# Altium PCB STM_System_Board.PCBDOC (part 8 of 16)
Units mm, origin at the board's own origin, x right, y up, seen from the top; angles counter-clockwise.
Board outline 222.53 x 100.01 mm, 6 copper layers (Top Layer, Int1 (GND), Int2 (Sign), Layer 1, Layer 2, Bottom Layer), stack 1.526 mm thick; 702 components, 774 nets, 3596 pads, 1988 vias.
Unrouted connection lines stored in the file: 1.
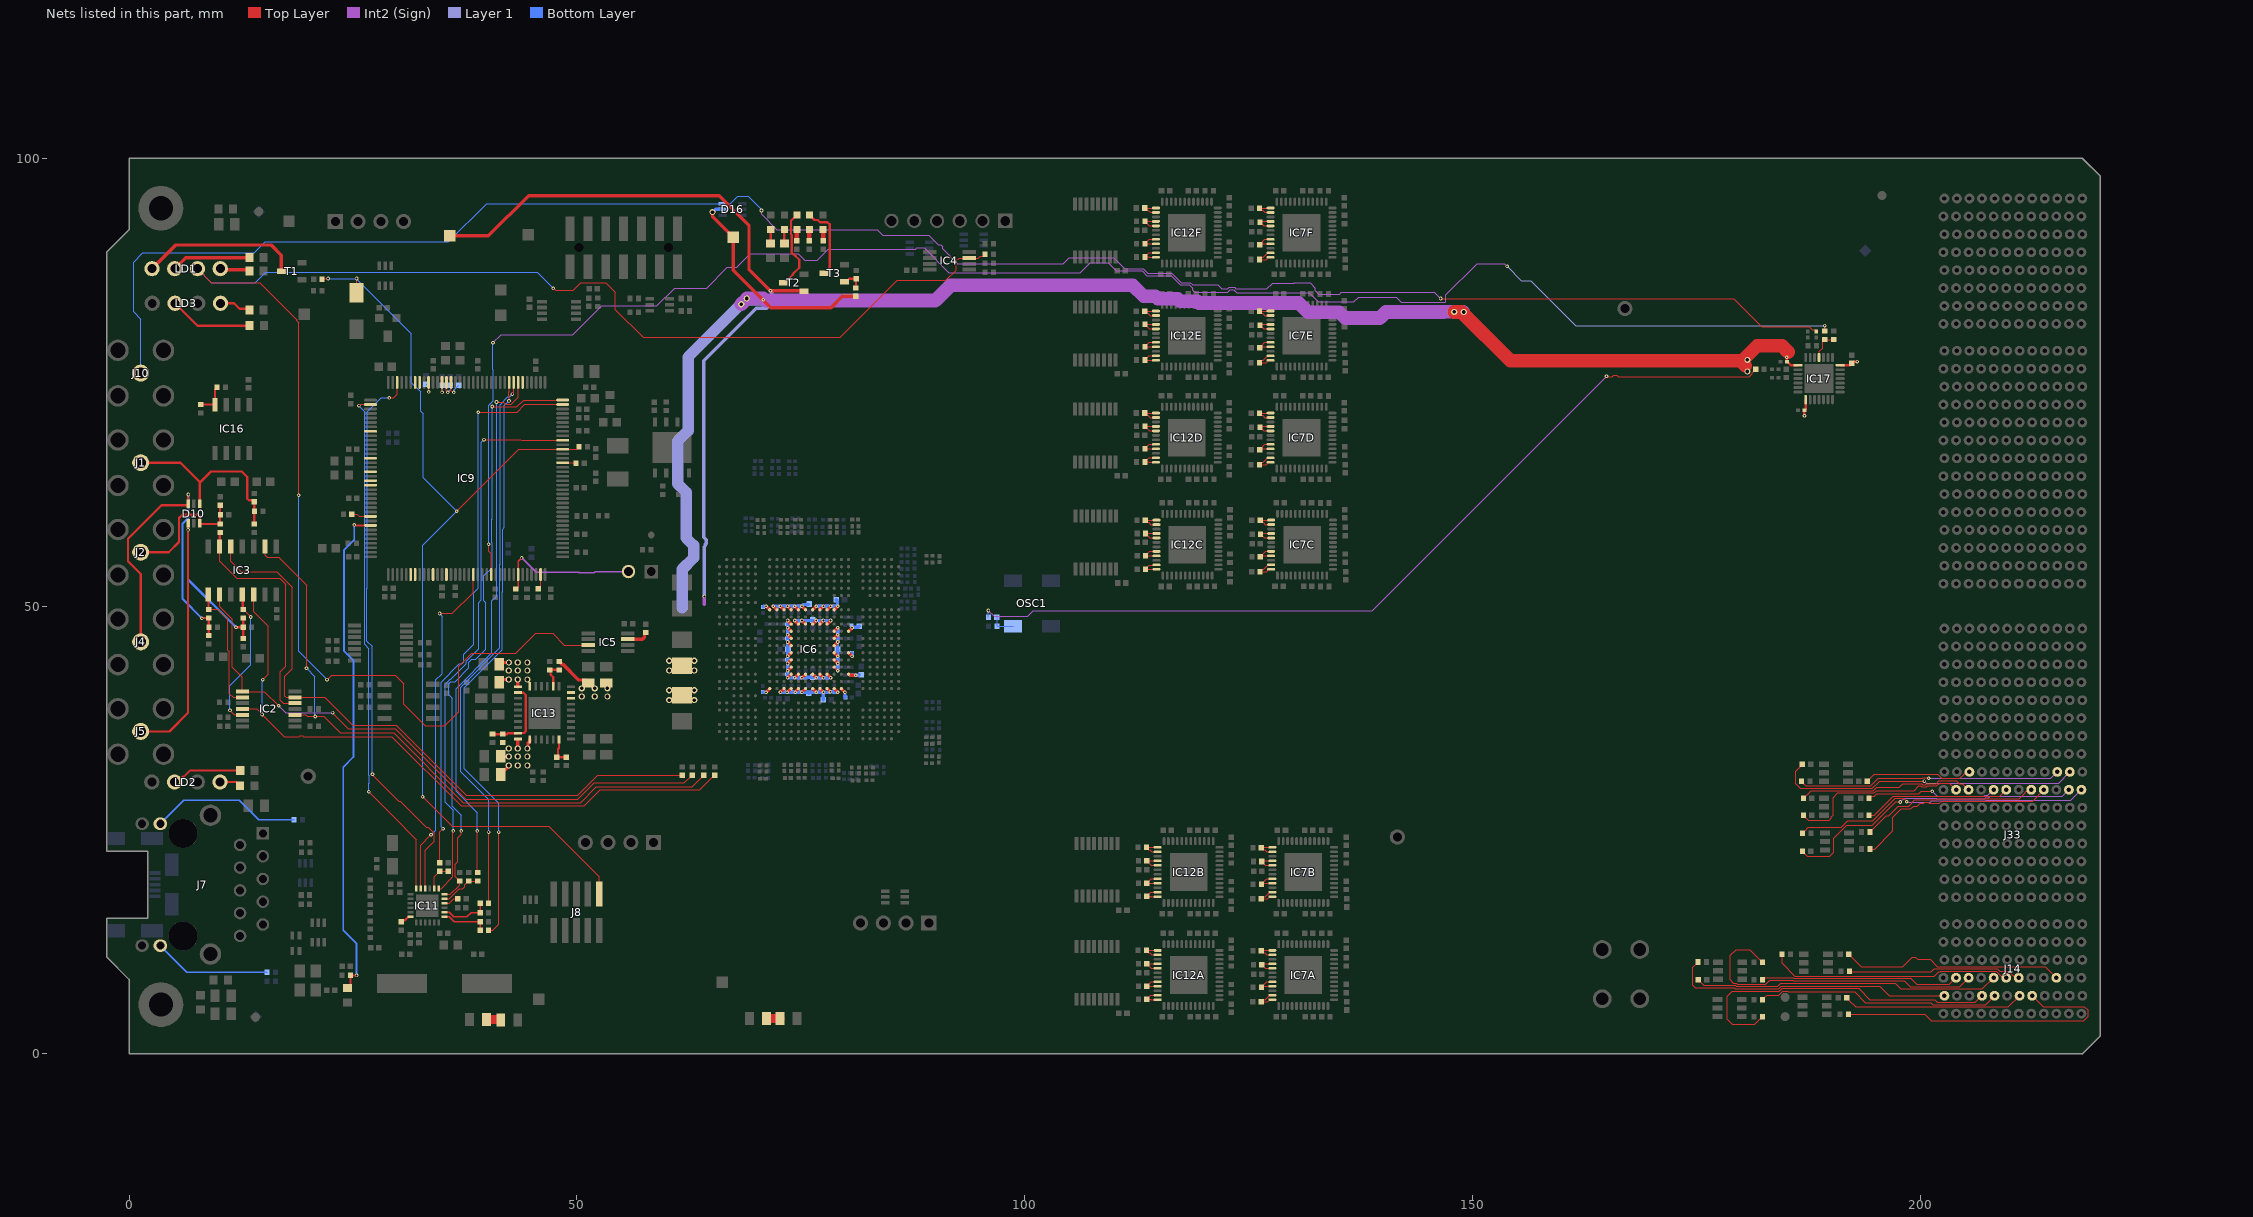
[diagram p11: the nets of this part, all layers, seen from the top]

## Via types
v1: diameter 0.4, hole 0.2, Top Layer to Bottom Layer, tented both sides, 1806 vias
v2: diameter 0.7, hole 0.4, Top Layer to Bottom Layer, tented both sides, 92 vias
v3: diameter 0.7, hole 0.4, Top Layer to Bottom Layer, 90 vias

## Nets (pads, with @x,y where several pads share a name; then routed paths per layer and width w, separated by ;. In a path a pad name is that pad's centre, name@x,y a point inside that pad or via, vN(x,y) a via of type N, cw(c..) or ccw(c..) an arc to the next point about the centre after c; other vN are vias at no path point) (continued)
NetIC2_3: IC2.3 IC3.2 R17.1 | length 73.2
  Top Layer w0.127: IC3.2@15.181,56.666 15.181,55.686 15.437,55.431 16.705,55.431 19.812,52.324 v1(19.812,43.053) ; IC2.3@18.701,37.694 IC2.3@18.539,37.856 19.73,37.856 19.916,37.669 v1(20.783,37.669) 21.756,37.669 23.575,35.85 29.525,35.85 37.308,28.067 50.399,28.067 52.177,29.845 62.879,29.845 64.138,31.104 R17.1@64.158,31.104
  Bottom Layer w0.127: v1(19.812,43.053) 20.742,42.123 20.742,37.71 v1(20.783,37.669)
NetIC2_5: IC2.5 IC3.6 R8.2 | length 26.6
  Top Layer w0.127: IC3.6@10.101,56.666 10.101,54.987 12.002,53.086 16.798,53.086 17.479,52.405 17.479,43.26 16.891,42.672 16.891,39.497 17.232,39.156 IC2.5@18.539,39.156
  Top Layer w0.254: IC3.6@10.101,56.666 10.131,56.696 10.131,58.175 R8.2@10.16,58.204
NetIC2_6: IC2.6 IC3.5 R5.1 | length 72.1
  Top Layer w0.127: IC3.5@11.371,56.666 11.371,54.996 12.519,53.848 16.485,53.848 18.23,52.102 18.23,42.995 17.399,42.164 17.399,39.933 17.526,39.806 IC2.6@18.539,39.806 21.844,39.806 24.95,36.7 29.823,36.7 37.643,28.88 50.099,28.88 52.323,31.104 R5.1@61.758,31.104
NetIC2_8: IC2.8 IC3.9 R6.1 | length 68.2
  Top Layer w0.127: IC3.9@10.101,51.266 10.101,49.945 11.525,48.521 11.525,43.151 12.639,42.037 IC2.8@12.639,40.456 15.111,40.456 v1(16.705,38.862) ; v1(22.725,38.1) 22.725,38.05 24.475,36.3 29.737,36.3 37.589,28.448 50.116,28.448 51.925,30.257 61.995,30.257 62.842,31.104 R6.1@62.862,31.104
  Int2 (Sign) w0.127: v1(16.705,38.862) 17.467,38.1 v1(22.725,38.1)
NetIC2_9: IC2.9 IC3.8 R92.2 | length 14.2
  Top Layer w0.127: R92.2@8.89,49.619 9.922,49.619 11.024,48.517 11.024,45.047 11.198,44.874 11.198,40.214 11.606,39.806 IC2.9@12.639,39.806
  Top Layer w0.254: IC3.8@8.831,51.266 8.861,51.237 8.861,49.648 R92.2@8.89,49.619
NetIC2_11: IC2.11 IC3.12 R7.1 | length 73
  Top Layer w0.127: IC2.11@12.639,38.506 14.233,38.506 v1(14.85,37.89) 17.306,35.433 18.991,35.433 19.053,35.496 19.377,35.496 19.439,35.433 29.329,35.433 37.076,27.686 50.814,27.686 52.592,29.464 63.698,29.464 65.338,31.104 R7.1@65.358,31.104 ; IC3.12@13.911,51.266 13.911,49.385 15.533,47.763 15.533,42.386 v1(14.93,41.783)
  Bottom Layer w0.127: v1(14.85,37.89) 14.89,37.93 14.89,41.743 v1(14.93,41.783)
NetIC2_12: IC2.12 IC3.11 R201.2 | length 15.9
  Top Layer w0.127: v1(11.266,38.354) 11.764,37.856 IC2.12@12.639,37.856 ; R201.2@12.698,49.675 12.718,49.675 13.589,48.804 v1(13.589,48.778)
  Top Layer w0.254: IC3.11@12.641,51.266 12.698,51.21 R201.2@12.698,49.675
  Bottom Layer w0.127: v1(11.266,38.354) 11.266,41.111 13.589,43.434 v1(13.589,48.778)
NetIC4_3: IC4.3 IC5.3 LD1.3 R218.1 | length 194.2
  Top Layer w0.127: LD1.3@7.645,87.655 9.195,86.106 14.605,86.106 18.732,81.978 18.732,81.836 18.923,81.646 v1(18.923,62.357) ; v1(22.098,41.783) 22.615,42.3 29.725,42.3 30.675,41.35 30.675,39.015 33.066,36.625 35.25,36.625 36.825,38.2 36.825,43.258 38.271,44.704 43.154,44.704 45.4,46.95 47.275,46.95 48.576,45.649 IC5.3@51.267,45.649 ; v1(47.35,85.45) 47.436,85.45 47.611,85.275 49.575,85.275 50.4,86.1 53.2,86.1 54.3,85 54.3,83.1 57.39,80.01 79.375,80.01 85.725,86.36 91.186,86.36 92.329,87.503 92.329,88.519 92.654,88.844 IC4.3@93.767,88.844 94.813,88.844 95.004,89.035 95.316,89.035 95.542,89.261 R218.1@95.542,89.281
  Bottom Layer w0.127: LD1.3@7.645,87.655 9.195,86.106 14.097,86.106 15.24,87.249 45.551,87.249 v1(47.35,85.45) ; v1(18.923,62.357) 18.923,44.958 v1(22.098,41.783)
NetIC5_7: IC5.7 R219.2 | length 2.5
  Top Layer w0.381: IC5.7@55.667,46.299 57.315,46.299 57.539,46.522 57.539,46.929 R219.2@57.638,47.028
NetIC7A_25: IC7A.25 IC7A.26 R173A.2 | length 2.7
  Top Layer w0.127: IC7A.26@127.625,11.056 126.984,11.056 126.756,11.285 126.621,11.285 126.395,11.511 R173A.2@126.395,11.531 126.42,11.556 IC7A.25@127.625,11.556
NetIC7A_28: IC7A.28 IC7A.29 R171A.2 | length 2.6
  Top Layer w0.127: IC7A.29@127.625,9.556 126.85,9.556 126.445,9.961 R171A.2@126.445,9.981 126.52,10.056 IC7A.28@127.625,10.056
NetIC7A_32: IC7A.32 IC7A.33 R169A.2 | length 2.4
  Top Layer w0.127: IC7A.33@127.625,7.556 126.511,7.556 126.511,7.576 126.991,8.056 IC7A.32@127.625,8.056
NetIC7A_35: IC7A.35 IC7A.36 R167A.2 | length 2.9
  Top Layer w0.137: IC7A.36@127.625,6.056 127.369,6.056 127.119,5.806 R167A.2@126.385,5.806 126.385,5.826 126.606,6.048 126.813,6.048 127.322,6.556 IC7A.35@127.625,6.556
NetIC7B_25: IC7B.25 IC7B.26 R173B.2 | length 2.7
  Top Layer w0.127: IC7B.26@127.625,22.556 126.984,22.556 126.756,22.785 126.621,22.785 126.395,23.011 R173B.2@126.395,23.031 126.42,23.056 IC7B.25@127.625,23.056
NetIC7B_28: IC7B.28 IC7B.29 R171B.2 | length 2.6
  Top Layer w0.127: IC7B.29@127.625,21.056 126.85,21.056 126.445,21.461 R171B.2@126.445,21.481 126.52,21.556 IC7B.28@127.625,21.556
NetIC7B_32: IC7B.32 IC7B.33 R169B.2 | length 2.4
  Top Layer w0.127: IC7B.33@127.625,19.056 126.511,19.056 126.511,19.076 126.991,19.556 IC7B.32@127.625,19.556
NetIC7B_35: IC7B.35 IC7B.36 R167B.2 | length 2.9
  Top Layer w0.137: IC7B.36@127.625,17.556 127.369,17.556 127.119,17.306 R167B.2@126.385,17.306 126.385,17.326 126.606,17.548 126.813,17.548 127.322,18.056 IC7B.35@127.625,18.056
NetIC7C_25: IC7C.25 IC7C.26 R173C.2 | length 2.7
  Top Layer w0.127: IC7C.26@127.494,59.096 126.853,59.096 126.625,59.325 126.49,59.325 126.264,59.551 R173C.2@126.264,59.571 126.289,59.596 IC7C.25@127.494,59.596
NetIC7C_28: IC7C.28 IC7C.29 R171C.2 | length 2.6
  Top Layer w0.127: IC7C.29@127.494,57.596 126.719,57.596 126.314,58.001 R171C.2@126.314,58.021 126.389,58.096 IC7C.28@127.494,58.096
NetIC7C_32: IC7C.32 IC7C.33 R169C.2 | length 2.4
  Top Layer w0.127: IC7C.33@127.494,55.596 126.38,55.596 126.38,55.616 126.86,56.096 IC7C.32@127.494,56.096
NetIC7C_35: IC7C.35 IC7C.36 R167C.2 | length 2.9
  Top Layer w0.137: IC7C.36@127.494,54.096 127.238,54.096 126.988,53.846 R167C.2@126.254,53.846 126.254,53.866 126.475,54.088 126.682,54.088 127.191,54.596 IC7C.35@127.494,54.596
NetIC7D_25: IC7D.25 IC7D.26 R173D.2 | length 2.7
  Top Layer w0.127: IC7D.26@127.429,71.044 126.788,71.044 126.56,71.273 126.425,71.273 126.199,71.499 R173D.2@126.199,71.519 126.224,71.544 IC7D.25@127.429,71.544
NetIC7D_28: IC7D.28 IC7D.29 R171D.2 | length 2.6
  Top Layer w0.127: IC7D.29@127.429,69.544 126.654,69.544 126.249,69.949 R171D.2@126.249,69.969 126.324,70.044 IC7D.28@127.429,70.044
NetIC7D_32: IC7D.32 IC7D.33 R169D.2 | length 2.4
  Top Layer w0.127: IC7D.33@127.429,67.544 126.315,67.544 126.315,67.564 126.795,68.044 IC7D.32@127.429,68.044
NetIC7D_35: IC7D.35 IC7D.36 R167D.2 | length 2.9
  Top Layer w0.137: IC7D.36@127.429,66.044 127.173,66.044 126.923,65.794 R167D.2@126.189,65.794 126.189,65.814 126.41,66.036 126.617,66.036 127.126,66.544 IC7D.35@127.429,66.544
NetIC7E_25: IC7E.25 IC7E.26 R173E.2 | length 2.7
  Top Layer w0.127: IC7E.26@127.429,82.429 126.788,82.429 126.56,82.658 126.425,82.658 126.199,82.884 R173E.2@126.199,82.904 126.224,82.929 IC7E.25@127.429,82.929
NetIC7E_28: IC7E.28 IC7E.29 R171E.2 | length 2.6
  Top Layer w0.127: IC7E.29@127.429,80.929 126.654,80.929 126.249,81.334 R171E.2@126.249,81.354 126.324,81.429 IC7E.28@127.429,81.429
NetIC7E_32: IC7E.32 IC7E.33 R169E.2 | length 2.4
  Top Layer w0.127: IC7E.33@127.429,78.929 126.315,78.929 126.315,78.949 126.795,79.429 IC7E.32@127.429,79.429
NetIC7E_35: IC7E.35 IC7E.36 R167E.2 | length 2.9
  Top Layer w0.137: IC7E.36@127.429,77.429 127.173,77.429 126.923,77.179 R167E.2@126.189,77.179 126.189,77.199 126.41,77.421 126.617,77.421 127.126,77.929 IC7E.35@127.429,77.929
NetIC7F_25: IC7F.25 IC7F.26 R173F.2 | length 2.7
  Top Layer w0.127: IC7F.26@127.429,93.929 126.788,93.929 126.56,94.158 126.425,94.158 126.199,94.384 R173F.2@126.199,94.404 126.224,94.429 IC7F.25@127.429,94.429
NetIC7F_28: IC7F.28 IC7F.29 R171F.2 | length 2.6
  Top Layer w0.127: IC7F.29@127.429,92.429 126.654,92.429 126.249,92.834 R171F.2@126.249,92.854 126.324,92.929 IC7F.28@127.429,92.929
NetIC7F_32: IC7F.32 IC7F.33 R169F.2 | length 2.4
  Top Layer w0.127: IC7F.33@127.429,90.429 126.315,90.429 126.315,90.449 126.795,90.929 IC7F.32@127.429,90.929
NetIC7F_35: IC7F.35 IC7F.36 R167F.2 | length 2.9
  Top Layer w0.137: IC7F.36@127.429,88.929 127.173,88.929 126.923,88.679 R167F.2@126.189,88.679 126.189,88.699 126.41,88.921 126.617,88.921 127.126,89.429 IC7F.35@127.429,89.429
NetIC9_22: IC9.22 R128.2 | length 1.5
  Top Layer w0.127: IC9.22@48.41,65.996 49.809,65.996 R128.2@49.88,65.925
NetIC9_27: IC9.27 IC11.13 | length 62
  Top Layer w0.127: IC11.13@34.553,18.461 34.844,18.461 36.154,19.771 36.154,24.851 v1(36.195,24.892) ; v1(39.624,68.58) 43.727,68.58 43.811,68.496 IC9.27@48.41,68.496
  Bottom Layer w0.127: v1(36.195,24.892) 36.195,27.2 35.275,28.12 35.275,41.261 35.833,41.819 35.915,41.819 37.661,43.566 37.661,43.839 39.045,45.223 39.045,50.388 39.335,50.678 39.335,68.291 v1(39.624,68.58)
NetIC9_35: IC9.35 R60.1 | length 62.2
  Top Layer w0.127: R60.1@34.695,21.335 34.695,24.789 v1(35.052,25.146) ; v1(38.989,71.628) 43.307,71.628 44.175,72.496 46.417,72.496 46.447,72.526 47.279,72.526 47.309,72.496 IC9.35@48.41,72.496
  Bottom Layer w0.127: v1(35.052,25.146) 34.825,25.373 34.825,41.5 36.876,43.552 37.119,43.552 37.347,43.78 37.347,44.597 38.472,45.721 38.472,51.47 38.989,51.987 v1(38.989,71.628)
NetIC9_36: IC9.36 IC11.12 R98.2 | length 67.5
  Top Layer w0.127: IC11.12@35.203,17.811 35.873,17.811 36.909,18.847 R98.2@36.909,19.304 36.889,19.304 36.408,19.784 36.408,21.175 36.703,21.469 36.703,24.13 37.084,24.511 v1(37.084,24.892) ; v1(40.538,72.272) 40.557,72.254 43.298,72.254 44.04,72.996 IC9.36@48.41,72.996
  Bottom Layer w0.127: v1(37.084,24.892) 37.084,26.67 36.1,27.654 36.1,39.723 35.709,40.113 35.709,40.437 35.709,41.337 35.938,41.565 36.391,41.565 37.915,43.09 37.915,43.734 38.232,44.051 38.676,44.051 39.826,45.201 39.826,50.388 39.615,50.6 39.615,53.375 40.522,54.283 40.522,57.058 40.504,57.077 40.504,59.672 40.538,59.707 v1(40.538,72.272)
NetIC9_42: IC9.42 | length 0
  Top Layer w0.127: IC9.42@43.935,74.971 IC9.42@43.939,74.975
NetIC9_43: IC9.43 R50.1 | length 59.9
  Top Layer w0.127: v1(38.862,24.892) 38.862,20.29 R50.1@38.909,20.244 ; v1(41.021,72.771) 41.783,72.771 42.046,72.508 42.663,72.508 43.435,73.28 IC9.43@43.435,74.971
  Bottom Layer w0.127: v1(38.862,24.892) 38.862,26.938 36.5,29.3 36.5,40.79 40.504,44.794 40.504,50.581 41.021,51.098 v1(41.021,72.771)
NetIC9_44: IC9.44 R45.1 | length 62
  Top Layer w0.127: v1(40.132,24.765) 40.139,24.758 R45.1@40.139,16.811 ; v1(42.799,73.66) 42.799,73.734 42.935,73.87 IC9.44@42.935,74.971
  Bottom Layer w0.127: v1(40.132,24.765) 40.132,28.368 37,31.5 37,40.931 41.406,45.337 41.406,54.654 41.439,54.687 41.439,72.471 42.302,73.334 42.473,73.334 v1(42.799,73.66)
NetIC9_45: IC9.45 R46.1 | length 65.6
  Top Layer w0.127: R46.1@40.139,13.814 40.611,13.814 41.275,14.478 v1(41.275,24.765) ; v1(42.418,72.898) 42.418,73.463 42.409,73.472 42.409,73.911 42.435,73.938 IC9.45@42.435,74.971
  Bottom Layer w0.127: v1(41.275,24.765) 41.275,27.988 37.4,31.863 37.4,40.86 41.66,45.12 41.66,51.587 41.693,51.62 41.693,58.572 41.91,58.79 41.91,72.39 v1(42.418,72.898)
NetIC9_58: IC9.58 R186.1 | length 2.4
  Top Layer w0.127: IC9.58@35.935,74.971 35.935,74.056 36.089,73.902 36.198,73.902 v1(36.25,73.85)
  Bottom Layer w0.127: v1(36.25,73.85) 36.302,73.902 36.302,74.152 36.805,74.655 R186.1@36.825,74.655
NetIC9_59: IC9.59 R187.1 | length 2.2
  Top Layer w0.127: IC9.59@35.435,74.971 35.435,74.056 35.575,73.916 v1(35.575,73.85)
  Bottom Layer w0.127: v1(35.575,73.85) 36.029,74.303 36.029,74.502 R187.1@35.875,74.655
NetIC9_60: IC9.60 R188.1 | length 1.9
  Top Layer w0.127: IC9.60@34.935,74.971 34.935,73.865 v1(34.95,73.85)
  Bottom Layer w0.127: v1(34.95,73.85) R188.1@34.95,74.655
NetIC9_63: IC9.63 R189.1 | length 2.1
  Top Layer w0.127: IC9.63@33.435,74.971 33.435,73.915 v1(33.45,73.9)
  Bottom Layer w0.127: R189.1@33.15,74.755 33.17,74.755 33.396,74.529 33.396,74.344 33.45,74.29 v1(33.45,73.9)
NetIC9_65: IC9.65
NetIC9_66: IC9.66
NetIC9_70: IC9.70 IC11.16 | length 62.5
  Top Layer w0.127: v1(27.172,31.216) 27.172,31.172 30.127,28.217 30.247,28.217 33.173,25.292 33.427,25.292 34.096,24.622 34.096,23.758 33.053,22.715 IC11.16@33.053,18.461 ; v1(29.042,73.238) 29.55,73.238 29.935,73.623 IC9.70@29.935,74.971
  Bottom Layer w0.127: v1(27.172,31.216) 27.149,31.239 27.149,45.484 26.543,46.091 26.543,51.971 26.578,52.006 26.578,71.663 28.153,73.238 v1(29.042,73.238)
NetIC9_74: IC9.74 IC11.18 | length 58
  Top Layer w0.127: v1(25.654,72.372) 25.728,72.372 25.853,72.496 IC9.74@26.96,72.496 ; v1@26.759,29.248 27.651,28.356 27.67,28.356 30.845,25.181 30.845,25.118 32.053,23.91 IC11.18@32.053,18.461
  Bottom Layer w0.127: v1(25.654,72.372) 26.324,71.702 26.324,52.111 26.289,52.077 26.289,45.72 26.772,45.237 26.772,31.083 26.806,31.048 26.806,30.235 26.772,30.2 v1(26.772,29.261)
NetIC9_80: IC9.80
NetIC9_86: IC9.86
NetIC9_89: IC9.89
NetIC9_91: IC9.91
NetIC9_92: IC9.92
NetIC9_99: IC9.99 R176.2 | length 2.2
  Top Layer w0.127: R176.2@24.87,60.25 25.425,60.25 25.679,59.996 IC9.99@26.96,59.996
NetIC9_101: IC9.101 R73.1 R75.2 | length 56.4
  Top Layer w0.203: R73.1@24.384,7.35 24.727,7.693 R75.2@24.727,8.763 v1(25.4,8.763) ; v1(25.146,59.055) 25.199,59.055 25.258,58.996 IC9.101@26.96,58.996
  Bottom Layer w0.203: v1(25.146,59.055) 25.146,57.404 23.978,56.236 23.978,45.012 25.048,43.942 25.048,33.15 23.908,32.011 23.908,13.811 25.4,12.319 v1(25.4,8.763)
NetIC9_114: IC9.114
NetIC9_115: IC9.115
NetIC9_119: IC9.119
NetIC9_122: IC9.122
NetIC9_128: IC9.128 IC11.17 | length 38.6
  Top Layer w0.127: IC11.17@32.553,18.461 32.551,18.463 32.551,23.305 v1(33.706,24.46) ; v1(34.671,49.169) 36.087,49.169 38.415,51.497 38.415,53.501 IC9.128@38.435,53.521
  Bottom Layer w0.127: v1(33.706,24.46) 33.753,24.46 34.25,24.958 34.25,41.75 34.966,42.466 34.966,48.874 v1(34.671,49.169)
NetIC9_132: IC9.132 R243.1 | length 189.8
  Top Layer w0.127: v1(40.132,56.896) 40.132,56.134 40.435,55.831 IC9.132@40.435,53.521
  Top Layer w0.137: v1(189.278,81.307) 189.278,80.706 R243.1@189.3,80.684
  Int2 (Sign) w0.127: v1(40.625,79.4) 41.525,80.3 49.525,80.3 52.75,83.525 58.925,83.525 60.9,85.5 64.5,85.5 66.8,87.8 67.825,87.8 69.366,89.34 70.159,89.34 70.2,89.3 74.725,89.3 75.4,88.625 76.825,88.625 78.025,89.825 87.805,89.825 87.956,89.975 88.763,89.975 91.513,87.225 106.2,87.225 107.275,88.3 109.3,88.3 110.2,87.4 113.1,87.4 113.611,86.889 116.118,86.889 116.13,86.876 116.316,86.876 117.339,85.854 118.371,85.854 118.74,85.485 118.74,85.243 118.969,85.014 119.989,85.014 120.002,85.026 122.65,85.026 122.927,85.303 123.297,85.303 123.625,84.975 131.75,84.975 132.765,83.96 136.735,83.96 137.25,84.475 141.45,84.475 142.025,83.9 146.901,83.9 146.975,83.974 146.975,84.725 150.475,88.225 153.525,88.225 v1(153.825,87.925)
  Layer 1 w0.127: v1(153.825,87.925) 155.425,86.325 156.475,86.325 161.493,81.307 164.425,81.307
  Layer 1 w0.137: 164.425,81.307 v1(189.278,81.307)
  Bottom Layer w0.127: v1(40.132,56.896) 40.132,72.419 40.64,72.927 40.64,76.414 40.627,76.427 40.627,79.398 v1(40.625,79.4)
NetIC9_138: IC9.138 JP2.2 R96.1 | length 16.5
  Top Layer w0.152: R96.1@43.174,51.889 43.194,51.889 43.435,52.131 IC9.138@43.435,53.521 43.435,54.992 v1(43.815,55.372)
  Int2 (Sign) w0.152: v1(43.815,55.372) 45.444,53.743 50.205,53.743 50.249,53.699 51.876,53.699 52.025,53.848 JP2.2@55.753,53.848
NetIC9_143: IC9.143 R97.1 | length 1.7
  Top Layer w0.127: R97.1@45.681,51.919 45.701,51.919 45.935,52.153 IC9.143@45.935,53.521
NetIC11_7: IC11.7 R43.2 R46.2 | length 5.2
  Top Layer w0.152: IC11.7@35.203,15.311 35.738,15.311 36.295,14.754 R43.2@39.199,14.754 R46.2@39.199,13.814
NetIC11_8: IC11.8 R42.2 R45.2 | length 5.4
  Top Layer w0.152: IC11.8@35.203,15.811 35.738,15.811 36.238,15.311 37.723,15.311 38.193,15.781 R42.2@39.199,15.781 R45.2@39.199,16.811
NetIC11_10: IC11.10 R47.1 | length 1.7
  Top Layer w0.127: IC11.10@35.203,16.811 35.734,16.811 36.238,17.314 R47.1@36.692,17.314
NetIC11_11: IC11.11 R44.2 R50.2 | length 4.6
  Top Layer w0.127: IC11.11@35.203,17.311 35.738,17.311 36.876,18.449 37.234,18.449 37.448,18.663 37.448,18.863 37.889,19.304 R44.2@37.909,19.304 R50.2@38.909,19.304
NetIC11_14: IC11.14 R60.2 R99.2 | length 3.2
  Top Layer w0.127: IC11.14@34.053,18.461 34.053,19.774 34.675,20.395 R60.2@34.695,20.395 R99.2@35.647,20.395
NetIC11_24: IC11.24 R49.1 | length 1.2
  Top Layer w0.254: R49.1@30.384,14.754 30.547,14.917 30.804,14.917 31.198,15.311 IC11.24@31.403,15.311
NetIC12A_25: IC12A.25 IC12A.26 R193A.2 | length 2.7
  Top Layer w0.127: IC12A.26@114.825,11.056 114.184,11.056 113.931,11.31 113.796,11.31 113.57,11.536 R193A.2@113.57,11.556 IC12A.25@114.825,11.556
NetIC12A_28: IC12A.28 IC12A.29 R191A.2 | length 2.6
  Top Layer w0.127: IC12A.29@114.825,9.556 114.09,9.556 113.61,10.036 R191A.2@113.61,10.056 IC12A.28@114.825,10.056
NetIC12A_32: IC12A.32 IC12A.33 R184A.2 | length 2.6
  Top Layer w0.127: IC12A.33@114.825,7.556 R184A.2@113.61,7.556 113.61,7.576 114.09,8.056 IC12A.32@114.825,8.056
NetIC12A_35: IC12A.35 IC12A.36 R175A.2 | length 2.3
  Top Layer w0.127: R175A.2@113.61,6.09 114.037,6.09 114.07,6.056 IC12A.36@114.825,6.056 ; R175A.2@113.823,6.323 113.836,6.336 114.038,6.538 114.806,6.538 IC12A.35@114.825,6.556
NetIC12B_25: IC12B.25 IC12B.26 R193B.2 | length 2.7
  Top Layer w0.127: IC12B.26@114.825,22.556 114.184,22.556 113.931,22.81 113.797,22.81 113.57,23.036 R193B.2@113.57,23.056 IC12B.25@114.825,23.056
NetIC12B_28: IC12B.28 IC12B.29 R191B.2 | length 2.6
  Top Layer w0.127: IC12B.29@114.825,21.056 114.09,21.056 113.61,21.536 R191B.2@113.61,21.556 IC12B.28@114.825,21.556
NetIC12B_32: IC12B.32 IC12B.33 R184B.2 | length 2.6
  Top Layer w0.127: IC12B.33@114.825,19.056 R184B.2@113.61,19.056 113.61,19.076 114.09,19.556 IC12B.32@114.825,19.556
NetIC12B_35: IC12B.35 IC12B.36 R175B.2 | length 2.3
  Top Layer w0.127: R175B.2@113.61,17.59 114.037,17.59 114.07,17.556 IC12B.36@114.825,17.556 ; R175B.2@113.823,17.823 113.836,17.836 114.038,18.038 114.806,18.038 IC12B.35@114.825,18.056
NetIC12C_25: IC12C.25 IC12C.26 R193C.2 | length 2.7
  Top Layer w0.127: IC12C.26@114.694,59.096 114.053,59.096 113.8,59.35 113.665,59.35 113.439,59.576 R193C.2@113.439,59.596 IC12C.25@114.694,59.596
NetIC12C_28: IC12C.28 IC12C.29 R191C.2 | length 2.6
  Top Layer w0.127: IC12C.29@114.694,57.596 113.959,57.596 113.479,58.076 R191C.2@113.479,58.096 IC12C.28@114.694,58.096
NetIC12C_32: IC12C.32 IC12C.33 R184C.2 | length 2.6
  Top Layer w0.127: IC12C.33@114.694,55.596 R184C.2@113.479,55.596 113.479,55.616 113.959,56.096 IC12C.32@114.694,56.096
NetIC12C_35: IC12C.35 IC12C.36 R175C.2 | length 2.3
  Top Layer w0.127: R175C.2@113.479,54.129 113.906,54.129 113.939,54.096 IC12C.36@114.694,54.096 ; R175C.2@113.692,54.363 113.705,54.376 113.907,54.578 114.675,54.578 IC12C.35@114.694,54.596
NetIC12D_25: IC12D.25 IC12D.26 R193D.2 | length 2.7
  Top Layer w0.127: IC12D.26@114.629,71.044 113.988,71.044 113.735,71.298 113.6,71.298 113.374,71.524 R193D.2@113.374,71.544 IC12D.25@114.629,71.544
NetIC12D_28: IC12D.28 IC12D.29 R191D.2 | length 2.6
  Top Layer w0.127: IC12D.29@114.629,69.544 113.894,69.544 113.414,70.024 R191D.2@113.414,70.044 IC12D.28@114.629,70.044
NetIC12D_32: IC12D.32 IC12D.33 R184D.2 | length 2.6
  Top Layer w0.127: IC12D.33@114.629,67.544 R184D.2@113.414,67.544 113.414,67.564 113.884,68.034 114.619,68.034 IC12D.32@114.629,68.044
NetIC12D_35: IC12D.35 IC12D.36 R175D.2 | length 2.3
  Top Layer w0.127: R175D.2@113.414,66.078 113.841,66.078 113.874,66.044 IC12D.36@114.629,66.044 ; R175D.2@113.627,66.311 113.64,66.324 113.842,66.526 114.61,66.526 IC12D.35@114.629,66.544
NetIC12E_25: IC12E.25 IC12E.26 R193E.2 | length 2.7
  Top Layer w0.127: IC12E.26@114.629,82.429 113.988,82.429 113.735,82.683 113.6,82.683 113.374,82.909 R193E.2@113.374,82.929 IC12E.25@114.629,82.929
NetIC12E_28: IC12E.28 IC12E.29 R191E.2 | length 2.6
  Top Layer w0.127: IC12E.29@114.629,80.929 113.894,80.929 113.414,81.409 R191E.2@113.414,81.429 IC12E.28@114.629,81.429
NetIC12E_32: IC12E.32 IC12E.33 R184E.2 | length 2.6
  Top Layer w0.127: IC12E.33@114.629,78.929 R184E.2@113.414,78.929 113.414,78.949 113.894,79.429 IC12E.32@114.629,79.429
NetIC12E_35: IC12E.35 IC12E.36 R175E.2 | length 2.3
  Top Layer w0.127: R175E.2@113.414,77.463 113.841,77.463 113.874,77.429 IC12E.36@114.629,77.429 ; R175E.2@113.627,77.696 113.64,77.709 113.842,77.911 114.61,77.911 IC12E.35@114.629,77.929
NetIC12F_25: IC12F.25 IC12F.26 R193F.2 | length 2.7
  Top Layer w0.127: IC12F.26@114.629,93.929 113.988,93.929 113.735,94.183 113.6,94.183 113.374,94.409 R193F.2@113.374,94.429 IC12F.25@114.629,94.429
NetIC12F_28: IC12F.28 IC12F.29 R191F.2 | length 2.6
  Top Layer w0.127: IC12F.29@114.629,92.429 113.894,92.429 113.414,92.909 R191F.2@113.414,92.929 IC12F.28@114.629,92.929
NetIC12F_32: IC12F.32 IC12F.33 R184F.2 | length 2.6
  Top Layer w0.127: IC12F.33@114.629,90.429 R184F.2@113.414,90.429 113.414,90.449 113.894,90.929 IC12F.32@114.629,90.929
NetIC12F_35: IC12F.35 IC12F.36 R175F.2 | length 2.3
  Top Layer w0.127: R175F.2@113.414,88.963 113.841,88.963 113.874,88.929 IC12F.36@114.629,88.929 ; R175F.2@113.627,89.196 113.64,89.209 113.842,89.411 114.61,89.411 IC12F.35@114.629,89.429
NetIC13_6: IC13.6 R234.1 R235.1 | length 3.2
  Top Layer w0.254: IC13.6@48.005,35.112 48.005,34.162 47.879,34.036 47.879,33.273 R235.1@47.732,33.127 R234.1@48.808,33.127
NetIC13_18: IC13.18 R232.1 R233.1 | length 3
  Top Layer w0.254: IC13.18@47.347,41.037 47.347,42.061 47.057,42.351 47.057,42.725 46.894,42.888 R232.1@47.881,42.888 ; R232.1@48.012,42.864 R232.1@48.032,42.864
NetIC13_24: IC13.24 IC13.31 R230.1 R231.1 | length 8.9
  Top Layer w0.254: R231.1@40.573,35.7 40.586,35.687 42.164,35.687 42.277,35.8 IC13.31@43.409,35.8 43.432,35.823 44.078,35.823 44.272,36.017 44.272,40.056 44.001,40.327 43.432,40.327 IC13.24@43.409,40.35
NetIC16_4: IC16.4 R237.1 R238.2 | length 3.5
  Top Layer w0.254: R238.2@7.994,72.485 9.416,72.485 9.589,72.658 9.589,74.174 9.817,74.402 R237.1@9.817,74.422
NetIC17_4: IC17.4 R243.2 R244.2 | length 3.3
  Top Layer w0.137: IC17.4@188.65,77.739 188.681,77.77 188.681,78.42 189.059,78.797 189.059,79.523 189.28,79.744 R243.2@189.3,79.744 R244.2@190.275,79.744
NetJ1_1: D10.1 J1.1 R15.1 R19.2 R20.1 | length 21.8
  Top Layer w0.254: J1.1@1.3,66 5.735,66 7.889,63.846 ; D10.1@7.889,61.425 7.889,63.846 ; R15.1@13.97,59.144 R19.2@13.97,61.633 13.807,61.796 13.388,61.796 13.208,61.976 13.208,64.389 12.573,65.024 9.144,65.024 7.966,63.846 7.889,63.846
NetJ2_1: D10.6 J2.1 R8.1 R9.2 R10.1 | length 15.2
  Top Layer w0.254: J2.1@1.3,56 4.438,56 5.588,57.15 5.588,59.817 5.969,60.198 7.74,60.198 7.889,60.049 D10.6@7.889,59.225 7.889,59.217 7.962,59.144 R8.1@10.16,59.144 R9.2@10.16,61.252
NetJ4_1: D10.3 J4.1 R92.1 R93.2 R200.1 | length 39.3
  Top Layer w0.254: J4.1@1.3,46 1.3,53.564 -0.127,54.991 -0.127,57.501 3.624,61.252 6.516,61.252 6.589,61.325 D10.3@6.589,61.425 6.589,62.413 v1(6.628,62.452) ; v1(8.128,48.641) 8.147,48.66 8.871,48.66 R92.1@8.89,48.679 R93.2@8.89,46.698
  Bottom Layer w0.254: v1(6.628,62.452) 6.628,59.841 5.969,59.182 5.969,50.8 v1(8.128,48.641)
NetJ5_1: D10.4 J5.1 R201.1 R202.2 R203.1 | length 43.5
  Top Layer w0.254: J5.1@1.3,36 4.504,36 6.589,38.085 v1(6.589,58.496) D10.4@6.589,59.225 ; v1(11.938,47.625) R203.1@12.738,47.625 R203.1@12.754,47.625 ; R202.2@12.754,46.384 R203.1@12.754,47.625 ; R201.1@12.754,48.679 R203.1@12.754,47.625
  Bottom Layer w0.254: v1(6.589,58.496) 6.589,52.974 v1(11.938,47.625)
NetJ7_L1: J7.L1 R212.2 | length 16.9
  Bottom Layer w0.152: J7.L1@3.49,25.695 6.116,28.321 12.319,28.321 14.478,26.162 R212.2@18.424,26.162
NetJ7_L3: J7.L3 R39.2 | length 13.1
  Bottom Layer w0.152: J7.L3@3.49,12.095 6.441,9.144 R39.2@15.405,9.144
NetJ10_1: C129.1 D16.6 J10.1 | length 211.9
  Top Layer w0.127: v1(146.4,84.325) 179.125,84.325 182.25,81.2 187.534,81.2 187.908,80.826 188.214,80.826 188.35,80.689 C129.1@188.35,80.664
  Int2 (Sign) w0.127: v1(70.6,94.15) 70.6,93.725 72.301,92.024 83.515,92.024 84.125,91.415 89.26,91.415 90.335,90.341 90.587,90.341 90.816,90.112 90.816,89.86 92.47,88.206 104.306,88.206 104.95,88.85 109.925,88.85 111.121,87.654 113.205,87.654 113.716,87.143 116.223,87.143 116.235,87.13 116.421,87.13 117.444,86.108 118.476,86.108 118.734,85.85 118.862,85.85 118.871,85.841 121.534,85.841 121.975,85.4 122.665,85.4 122.821,85.557 123.403,85.557 123.559,85.4 127.025,85.4 127.675,86.05 130.049,86.05 130.064,86.065 131.844,86.065 132.408,85.5 132.408,85.217 132.8,84.825 135.127,84.825 135.329,85.026 145.699,85.026 v1(146.4,84.325)
  Bottom Layer w0.127: J10.1@1.3,76 1.3,82.025 0.5,82.825 0.5,88.4 1.525,89.425 13.975,89.425 15.2,90.65 35.65,90.65 39.925,94.925 D16.6@66.275,94.925 67.125,94.925 67.925,95.725 69.125,95.725 70.501,94.349 70.501,94.323 70.6,94.224 v1(70.6,94.15)
NetJ14_C3: J14.C3 R125.2 | length 25.2
  Top Layer w0.127: R125.2@191.96,11.141 191.96,11.121 192.186,10.895 192.206,10.895 193.342,9.759 198.009,9.759 199.065,10.816 199.412,10.816 199.643,10.585 201.04,10.585 201.866,9.759 213.879,9.759 J14.C3@215.139,8.5
NetJ14_E2: J14.E2 R126.2 | length 34.9
  Top Layer w0.127: R126.2@191.967,4.371 R126.2@191.92,4.418 200.455,4.418 201.165,3.708 218.194,3.708 218.679,4.193 218.679,4.866 218.262,5.283 213.656,5.283 J14.E2@212.439,6.5
NetJ14_F2: J14.F2 R127.2 | length 20.3
  Top Layer w0.127: R127.2@191.731,6.268 191.731,6.248 191.957,6.022 191.977,6.022 192.748,5.251 209.79,5.251 J14.F2@211.039,6.5
NetJ14_F3: J14.F3 R137.2 | length 19.5
  Top Layer w0.127: R137.2@192.047,9.241 192.113,9.175 201.175,9.175 201.494,9.494 208.551,9.494 208.805,9.24 209.845,9.24 210.279,8.807 210.279,8.782 210.376,8.686 210.753,8.686 J14.F3@210.939,8.5
NetJ14_G3: J14.G3 R138.2 | length 27.2
  Top Layer w0.127: R138.2@184.518,11.141 184.518,10.122 185.953,8.687 201.529,8.687 202.037,9.195 202.207,9.195 202.253,9.24 208.445,9.24 208.879,8.807 208.879,8.782 208.976,8.686 209.353,8.686 J14.G3@209.539,8.5
NetJ14_H2: J14.H2 R139.2 | length 27.3
  Top Layer w0.127: R139.2@182.343,6.075 182.343,6.095 182.57,6.322 182.59,6.322 182.847,6.579 184.145,6.579 184.575,7.009 185.147,7.009 185.231,6.925 192.617,6.925 193.827,5.715 201.117,5.715 201.327,5.505 207.244,5.505 J14.H2@208.239,6.5
NetJ14_H3: J14.H3 R140.2 | length 34.2
  Top Layer w0.127: R140.2@175.164,8.284 175.164,8.264 175.391,8.038 175.407,8.038 175.788,7.657 179.283,7.657 179.41,7.53 182.817,7.53 182.856,7.569 184.058,7.569 184.363,7.874 197.129,7.874 197.752,7.251 206.89,7.251 J14.H3@208.139,8.5
NetJ14_I2: J14.I2 R141.2 | length 36.8
  Top Layer w0.127: R141.2@182.343,4.168 182.343,4.148 182.117,3.922 182.097,3.922 181.485,3.31 178.963,3.31 178.41,3.863 178.41,6.437 178.963,6.99 184.198,6.99 184.522,7.315 193.065,7.315 194.31,6.071 201.549,6.071 201.86,5.759 206.098,5.759 J14.I2@206.839,6.5
NetJ14_J3: J14.J3 R142.2 | length 34.9
  Top Layer w0.127: R142.2@182.343,10.234 182.343,10.254 182.117,10.481 182.097,10.481 180.919,11.659 179.4,11.659 178.74,10.998 178.74,8.268 179.096,7.911 179.388,7.911 179.515,7.784 182.712,7.784 183.158,8.23 185.692,8.23 185.743,8.179 198.145,8.179 198.806,7.518 202.114,7.518 202.127,7.505 202.951,7.505 202.964,7.518 204.357,7.518 J14.J3@205.339,8.5
NetJ14_K3: J14.K3 R143.2 | length 22.3
  Top Layer w0.127: R143.2@182.343,8.284 182.343,8.304 182.57,8.531 185.75,8.531 185.848,8.433 198.882,8.433 199.542,7.772 202.219,7.772 202.232,7.759 202.845,7.759 202.858,7.772 203.211,7.772 J14.K3@203.939,8.5
NetJ14_L2: J14.L2 R204.2 | length 31.6
  Top Layer w0.127: R204.2@175.146,10.262 175.146,10.242 174.574,9.67 174.574,7.671 174.842,7.403 179.177,7.403 179.305,7.276 184.124,7.276 184.417,7.569 195.408,7.569 196.477,6.5 J14.L2@202.639,6.5
NetJ33_A7: J33.A7 R262.2 | length 33.6
  Top Layer w0.127: R262.2@186.804,24.638 186.804,24.658 187.031,24.884 187.051,24.884 187.465,25.298 191.148,25.298 191.63,25.781 191.643,25.781 191.872,26.01 194.666,26.01 197.172,28.516 198.084,28.516 v1(198.45,28.15)
  Int2 (Sign) w0.127: v1(198.45,28.15) 198.502,28.098 198.638,28.098 198.661,28.075 200.448,28.075 200.488,28.115 200.812,28.115 200.852,28.075 201.085,28.075 201.252,28.241 207.256,28.241 207.335,28.321 216.77,28.321 J33.A7@217.939,29.49
NetJ33_B7: J33.B7 R263.2 | length 34
  Top Layer w0.127: R263.2@186.79,22.619 186.79,22.599 187.016,22.373 187.036,22.373 187.336,22.073 189.84,22.073 190.271,22.504 190.271,24.063 191.736,25.527 194.589,25.527 197.187,28.125 v1(197.725,28.125)
  Int2 (Sign) w0.127: v1(197.725,28.125) 198.14,28.54 201.707,28.54 201.752,28.495 207.151,28.495 207.254,28.599 207.607,28.599 207.758,28.749 215.798,28.749 J33.B7@216.539,29.49
NetJ33_B8: J33.B8 R264.2 | length 34.3
  Top Layer w0.127: R264.2@186.779,32.331 186.779,32.311 186.553,32.085 186.533,32.085 186.03,31.582 186.03,30.15 186.538,29.642 194.615,29.642 195.428,30.455 v1(200.406,30.455)
  Int2 (Sign) w0.127: v1(200.406,30.455) 200.63,30.23 215.379,30.23 J33.B8@216.639,31.49
NetJ33_C8: J33.C8 R265.2 | length 29.5
  Top Layer w0.127: R265.2@186.683,30.431 186.683,30.411 186.909,30.184 186.929,30.184 187.193,29.921 194.412,29.921 195.275,30.785 200.184,30.785 200.244,30.845 200.568,30.845 200.576,30.837 200.836,30.837 v1(200.889,30.785)
  Int2 (Sign) w0.127: v1(200.889,30.785) 200.924,30.749 214.498,30.749 J33.C8@215.239,31.49
NetJ33_D7: J33.D7 R266.2 | length 23.2
  Top Layer w0.127: R266.2@194.325,22.876 194.851,22.876 196.9,24.925 196.9,26.425 197.825,27.35 198.9,27.35 199.212,27.662 199.612,27.662 199.919,27.969 200.341,27.969 200.488,28.115 200.812,28.115 200.959,27.969 202.07,27.969 202.332,28.23 212.479,28.23 J33.D7@213.739,29.49
NetJ33_E7: J33.E7 R267.2 | length 20
  Top Layer w0.127: R267.2@194.325,24.776 194.325,24.796 194.552,25.022 194.572,25.022 196.166,26.617 196.417,26.617 197.475,27.675 198.65,27.675 199.345,28.369 201.844,28.369 201.97,28.495 210.992,28.495 211.679,29.183 211.679,29.207 211.776,29.304 212.153,29.304 J33.E7@212.339,29.49
NetJ33_G7: J33.G7 R268.2 | length 16.5
  Top Layer w0.127: R268.2@194.239,26.63 194.803,26.63 196.943,28.77 202.212,28.77 202.232,28.749 208.798,28.749 J33.G7@209.539,29.49
NetJ33_H7: J33.H7 R269.2 | length 14.8
  Top Layer w0.127: R269.2@194.239,28.53 194.239,28.55 194.465,28.776 194.827,28.776 195.108,29.058 199.796,29.058 200.05,29.312 v1(201.295,29.312)
  Int2 (Sign) w0.127: v1(201.295,29.312) 201.857,28.749 207.046,28.749 207.149,28.853 207.502,28.853 J33.H7@208.139,29.49
NetJ33_J7: J33.J7 R270.2 | length 19.8
  Top Layer w0.127: R270.2@186.899,28.53 186.899,28.55 187.125,28.776 187.145,28.776 187.757,29.388 194.72,29.388 195.101,29.769 197.612,29.769 198.02,30.177 200.131,30.177 200.244,30.064 200.568,30.064 200.681,30.177 201.707,30.177 202.014,30.484 203.992,30.484 204.309,30.167 204.662,30.167 J33.J7@205.339,29.49
NetJ33_J8: J33.J8 R271.2 | length 12.3
  Top Layer w0.127: R271.2@194.019,30.431 194.795,31.207 201.874,31.207 202.332,30.749 204.346,30.749 204.779,31.183 204.779,31.207 204.876,31.304 205.253,31.304 J33.J8@205.439,31.49
NetJ33_K7: J33.K7 R272.2 | length 20.6
  Top Layer w0.127: R272.2@186.899,26.63 186.899,26.61 187.125,26.383 187.145,26.383 187.443,26.086 189.794,26.086 190.034,26.326 190.034,26.484 190.221,26.67 190.221,28.6 190.754,29.134 194.825,29.134 195.079,29.388 199.263,29.388 199.798,29.923 200.026,29.923 200.139,29.81 200.673,29.81 200.786,29.923 201.812,29.923 202.119,30.23 203.198,30.23 J33.K7@203.939,29.49
NetLD1_1: LD1.1 T1.3 | length 17.8
  Top Layer w0.381: LD1.1@2.565,87.655 5.207,90.297 15.875,90.297 17.011,89.161 T1.3@17.011,87.376
NetLD1_2: LD1.2 R206.2 | length 8.8
  Top Layer w0.381: LD1.2@5.105,87.655 6.35,88.9 R206.2@13.424,88.9
NetLD1_4: LD1.4 R209.1 | length 3.4
  Top Layer w0.381: LD1.4@10.185,87.655 10.325,87.516 13.284,87.516 R209.1@13.424,87.376
NetLD2_2: LD2.2 R58.1 | length 7.9
  Top Layer w0.203: LD2.2@5.08,30.353 5.334,30.353 5.942,30.961 6.069,30.961 6.136,30.961 6.329,31.154 6.8,31.625 R58.1@12.411,31.625
NetLD2_4: LD2.4 R76.1 | length 2.4
  Top Layer w0.203: LD2.4@10.16,30.353 12.029,30.353 12.392,29.99 R76.1@12.392,29.94
NetLD3_2: LD3.2 R77.1 | length 9.4
  Top Layer w0.254: LD3.2@5.131,83.795 7.631,81.295 R77.1@13.467,81.295
NetLD3_4: LD3.4 R78.1 | length 3.5
  Top Layer w0.254: LD3.4@10.211,83.795 11.709,83.795 12.319,83.185 13.297,83.185 R78.1@13.424,83.058
NetLD4_2: LD4.2 R195.1 | length 1.2
  Top Layer w0.508: R195.1@77.47,90.767 LD4.2@77.47,92.012
NetLD5_2: LD5.2 R196.2 | length 1.5
  Top Layer w0.254: R196.2@71.628,90.462 LD5.2@71.628,92.012
NetLD6_1: LD6.1 T2.3 | length 9.1
  Top Layer w0.254: T2.3@73.025,86.106 73.225,86.106 74.101,86.981 74.101,87.055 74.803,87.757 74.803,88.646 74.166,89.283 74.134,89.283 73.985,89.432 73.985,91.417 73.895,91.507 73.895,93.008 LD6.1@74.549,93.662
NetLD6_2: LD6.2 R207.1 | length 1.2
  Top Layer w0.508: R207.1@74.549,90.767 LD6.2@74.549,92.012
NetLD7_1: LD7.1 T3.3 | length 8.5
  Top Layer w0.254: LD7.1@75.946,93.662 76.517,93.091 76.882,93.091 77.136,92.837 77.978,92.837 78.232,92.583 78.232,87.81 77.953,87.531 77.953,87.331 77.78,87.158 T3.3@77.58,87.158
NetLD7_2: LD7.2 R208.1 | length 1.2
  Top Layer w0.508: R208.1@75.946,90.767 LD7.2@75.946,92.012
NetLD8_2: LD8.2 R236.2 | length 1.5
  Top Layer w0.254: R236.2@73.152,90.462 LD8.2@73.152,92.012
NetOSC1_3: OSC1.3 R205.1 R283.2 | length 3
  Bottom Layer w0.137: R283.2@96.9,48.925 96.9,47.762 OSC1.3@98.693,47.762
NetR213_1: R213.1 R214.2 T3.1 | length 2.4
  Top Layer w0.254: T3.1@79.88,86.208 80.08,86.208 80.397,86.525 R214.2@81.153,86.525 R213.1@81.152,85.538
NetR242_2: R242.2 R283.1 | length 98.4
  Top Layer w0.137: v1(164.925,75.65) 164.975,75.6 165.566,75.6 165.736,75.771 166.064,75.771 166.234,75.6 180.847,75.6 181.196,75.949 181.196,76.035 181.58,76.419 R242.2@181.58,76.439
  Int2 (Sign) w0.137: v1(95.925,49.5) 96.575,48.85 100.3,48.85 100.95,49.5 138.775,49.5 v1(164.925,75.65)
  Bottom Layer w0.137: R283.1@95.925,48.73 v1(95.925,49.5)
NetR287_2: R287.2 R288.1 | length 1.5
  Top Layer w1: R287.2@71.158,3.959 71.158,3.955 R288.1@72.65,3.955
NetR289_2: R289.2 R290.1 | length 1.6
  Top Layer w1: R290.1@39.925,3.825 R289.2@41.484,3.825
NRST: D1.2 IC9.25 J8.10 R13.2 R14.1 | length 111.6
  Top Layer w0.127: R14.1@21.552,86.487 21.625,86.56 v1(22.225,86.56) ; D1.2@25.4,84.981 v1(25.4,86.56) ; v1(32.766,28.702) 36.068,25.4 46.863,25.4 52.505,19.758 J8.10@52.505,17.754 ; v1(36.576,60.579) 43.493,67.496 49.97,67.496 50.22,67.746 R13.2@50.22,67.766
  Bottom Layer w0.127: v1(22.225,86.56) 25.327,86.56 v1@25.364,86.523 ; v1(25.4,86.56) 25.4,86.487 31.5,80.387 31.5,74.95 32.55,73.9 32.55,71.75 32.85,71.45 32.85,64.305 v1(36.576,60.579) 32.766,56.769 v1(32.766,28.702)
P1V1: C27.2 C28.2 C29.2 C30.2 C104.2 C105.2 C106.1 C110.2 C111.2 C112.2 C113.2 C114.2 C115.2 C116.2 C117.2 C118.2 C119.2 C120.2 C121.2 C122.2 C123.2 C124.2 C125.2 C126.2 C127.2 IC6.K11 IC6.K12 IC6.K13 IC6.K14 IC6.K15 IC6.K16 IC6.L10 IC6.L17 IC6.M10 IC6.M17 IC6.N10 IC6.N17 IC6.P10 IC6.P17 IC6.R10 IC6.R17 IC6.T10 IC6.T11 IC6.T12 IC6.T13 IC6.T14 IC6.T15 IC6.T16 IC6.T17 IC13.1 IC13.22 IC13.23 IC13.32 R230.2 T2.1 TP9.1 | length 129.1
  Top Layer w0.254: IC6.K16@78.715,43.184 v1(79.115,42.784)
  Top Layer w0.381: TP9.1@35.814,91.313 40.113,91.313 44.6,95.8 65.9,95.8 69.2,92.5 69.2,87.6 v1(71.6,85.2) 75.281,85.2 T2.1@75.303,85.178 ; C29.2@41.345,41.481 41.664,41.8 v2(42.4,41.8) ; C27.2@41.345,43.485 41.556,43.696 v2(42.403,43.696) ; C28.2@41.473,31.195 41.473,31.37 41.808,31.704 41.983,31.704 42.4,32.122 v2(42.4,32.2) ; C30.2@41.473,33.227 41.5,33.2 v2(42.4,33.2) ; v2(43.392,34.1) 43.392,35.133 IC13.32@43.409,35.15 ; v2(43.392,41.8) 43.409,41.783 IC13.23@43.409,41 ; v2(44.473,34.1) 44.534,34.161 44.534,34.676 44.739,34.881 IC13.1@44.739,35.112 ; v1(73.515,41.984) IC6.T17@73.915,42.384 ; v1(73.515,42.784) IC6.T16@73.915,43.184 ; v1(73.515,43.584) IC6.T15@73.915,43.984 ; v1(73.515,44.384) IC6.T14@73.915,44.784 ; v1(73.515,45.984) IC6.T13@73.915,45.584 ; v1(73.515,46.784) IC6.T12@73.915,46.384 ; v1(73.515,47.584) IC6.T11@73.915,47.184 ; v1(73.515,48.384) IC6.T10@73.915,47.984 ; v1(74.315,41.984) IC6.R17@74.715,42.384 ; v1(74.315,48.384) IC6.R10@74.715,47.984 ; v1(75.115,41.984) IC6.P17@75.515,42.384 ; v1(75.115,48.384) IC6.P10@75.515,47.984 ; IC6.N17@76.315,42.384 v1(76.715,41.984) ; IC6.N10@76.315,47.984 v1(76.715,48.384) ; IC6.M17@77.115,42.384 v1(77.515,41.984) ; IC6.M10@77.115,47.984 v1(77.515,48.384) ; IC6.L17@77.915,42.384 v1(78.315,41.984) ; IC6.L10@77.915,47.984 v1(78.315,48.384) ; IC6.K15@78.715,43.984 v1(79.115,43.584) ; IC6.K14@78.715,44.784 v1(79.115,44.384) ; IC6.K13@78.715,45.584 v1(79.115,45.984) ; IC6.K12@78.715,46.384 v1(79.115,46.784) ; IC6.K11@78.715,47.184 v1(79.115,47.584)
  Int2 (Sign) w0.381: 64.225,50.175 v1(64.225,51.075)
  Layer 1 w0.381: v1(64.225,51.075) 64.225,56.625 64.343,56.743 64.343,56.895 64.411,56.963 64.411,57.392 64.133,57.67 64.133,77.358 70,83.225 71.172,83.225 71.753,83.805 71.753,85.042 71.6,85.195 v1(71.6,85.2)
  Bottom Layer w0.127: v1@74.315,41.919 v1(74.315,41.984)
  Bottom Layer w0.381: v1(73.515,48.384) v1(73.515,47.584) v1(73.515,46.784) v1(73.515,45.984) v1(73.515,44.384) v1(73.515,43.584) v1(73.515,42.784) v1(73.515,41.984) v1(74.315,41.984) v1(75.115,41.984) 75.461,41.984 75.48,42.003 75.505,42.003 75.515,42.013 C123.2@75.515,42.038 76.656,42.038 76.71,41.984 v1(76.715,41.984) v1(77.515,41.984) v1(78.315,41.984) ; v1(74.315,48.384) v1(75.115,48.384) 75.45,48.384 75.471,48.363 75.496,48.363 C115.2@75.505,48.354 ; C115.2@75.505,48.329 C115.2@75.505,48.354 ; v1(78.315,48.384) v1(77.515,48.384) v1(76.715,48.384) 75.561,48.384 75.54,48.363 75.515,48.363 C115.2@75.505,48.354 ; C105.2@79.081,45.199 79.081,45.945 79.115,45.979 v1(79.115,45.984) v1(79.115,46.784) v1(79.115,47.584) ; v1(79.115,42.784) v1(79.115,43.584) v1(79.115,44.384) ; v1@79.12,44.411 C105.2@79.12,45.058
  other v2: 43.392,32.2 44.473,32.2 43.392,33.2 44.473,33.2 42.4,34.1 44.473,41.8 42.4,42.8 43.392,42.8 44.473,42.8 60.3,42.8 63.1,42.8 43.392,43.7 44.473,43.7 60.3,43.9 63.1,43.9
P2V5: C32.2 C33.2 C54.2 C58.2 C59.2 C60.2 C61.2 C62.2 C63.2 C64.2 C65.2 C66.2 C68.2 C69.2 C76.2 C77.2 C90.2 C92.2 C93.2 C94.2 C95.2 C96.2 C97.2 C98.2 C99.2 C100.2 C101.1 C132.2 C133.2 C134.2 D16.5 IC6.H11 IC6.H14 IC6.H17 IC6.J19 IC6.K8 IC6.K19 IC6.L8 IC6.L19 IC6.M8 IC6.M19 IC6.N8 IC6.N19 IC6.P8 IC6.P19 IC6.R8 IC6.R19 IC6.T8 IC6.T19 IC6.U8 IC6.U19 IC6.V8 IC6.W8 IC6.W19 IC13.14 IC13.15 IC17.8 IC17.15 IC17.28 R213.2 R232.2 TP6.1 | length 233.7
  Top Layer w0.127: v1(73.461,40.384) v1@73.488,40.384 ; IC6.T19@73.888,40.784 IC6.T19@73.915,40.784 ; v1(74.369,40.384) v1@74.369,40.411 ; IC6.R19@74.715,40.757 IC6.R19@74.715,40.784
  Top Layer w0.254: v1(185.05,77.77) C133.2@185.05,77.289 185.123,77.216 185.177,77.216 185.504,76.889 IC17.8@186.3,76.889 ; v1(187.025,71.25) 187.013,71.263 187.013,71.827 C132.2@187,71.839 187.025,71.839 187.15,71.964 IC17.15@187.15,73.039 ; IC17.28@191,76.889 192.1,76.889 C134.2@192.3,77.089 192.483,77.272 192.886,77.272 v1(192.903,77.289)
  Top Layer w0.381: R232.2@48.012,43.804 48.032,43.804 48.364,43.471 48.477,43.471 50.209,41.739 50.907,41.739 C33.2@51.241,41.405 ; v2(65.125,93.975) 65.125,93.498 TP6.1@67.437,91.186 67.437,87.503 71.628,83.312 78.359,83.312 79.617,84.57 R213.2@81.131,84.57 ; v1(71.115,40.384) IC6.W19@71.515,40.784 ; v1(71.115,49.984) IC6.W8@71.515,49.584 ; v1(71.915,49.984) IC6.V8@72.315,49.584 ; v1(72.715,40.384) IC6.U19@73.115,40.784 ; v1(72.715,49.984) IC6.U8@73.115,49.584 ; v1@73.488,40.384 IC6.T19@73.888,40.784 ; v1(73.515,49.984) IC6.T8@73.915,49.584 ; v1(74.315,49.984) IC6.R8@74.715,49.584 ; v1@74.369,40.411 IC6.R19@74.715,40.757 ; v1(75.115,40.384) IC6.P19@75.515,40.784 ; v1(75.115,49.984) IC6.P8@75.515,49.584 ; IC6.N19@76.315,40.784 v1(76.715,40.384) ; IC6.N8@76.315,49.584 v1(76.715,49.984) ; IC6.M19@77.115,40.784 v1(77.515,40.384) ; IC6.M8@77.115,49.584 v1(77.515,49.984) ; IC6.L19@77.915,40.784 v1@78.265,40.434 ; IC6.L8@77.915,49.584 v1(78.315,49.984) ; IC6.K19@78.715,40.784 v1(79.115,40.384) ; IC6.K8@78.715,49.584 v1(79.115,49.984) ; IC6.J19@79.515,40.784 v1(79.915,40.384) ; IC6.H17@80.315,42.384 80.385,42.384 80.489,42.281 81.114,42.281 81.12,42.275 v1(81.125,42.275) ; IC6.H14@80.315,44.784 v1(80.715,44.384) ; IC6.H11@80.315,47.184 v1(80.715,47.584)
  Top Layer w1.524: v2(147.925,82.829) 148.746,82.829 154.2,77.375 180.075,77.375 181.75,79.05 184.508,79.05 185.2,78.358 185.2,78.35 ; 179.85,77.375 180.401,76.824
  Int2 (Sign) w1.524: v2(68.325,83.675) 68.95,84.3 v2(68.95,84.325) 70.8,84.325 71.014,84.111 90.01,84.111 91.689,85.789 112.051,85.789 113.258,84.583 114.55,84.583 114.833,84.3 115.728,84.3 115.731,84.303 116.569,84.303 116.572,84.3 117.072,84.3 117.354,84.018 119.23,84.018 119.425,83.823 130.578,83.823 131.597,82.804 135.093,82.804 135.753,82.144 139.624,82.144 140.31,82.829 146.764,82.829 146.799,82.864 147.89,82.864 v2(147.925,82.829) v2@148.925,82.829
  Layer 1 w0.381: 80.7,42.25 81.095,42.25 v1@81.12,42.275
  Layer 1 w1.27: 61.747,49.8 61.747,54.102 63.017,55.372 63.017,56.769 62.179,57.607 62.179,62.713 61.239,63.652 61.239,68.402 62.408,69.571 62.408,77.783 68.825,84.2 v1(70.8,84.2) ; v2(68.95,84.325) 70.584,84.325
  Bottom Layer w0.381: v2(65.125,93.975) 65.208,93.975 65.508,94.275 D16.5@66.275,94.275 ; C77.2@70.736,40.394 70.743,40.388 71.111,40.388 v1(71.115,40.384) ; C95.2@70.77,49.917 70.77,49.942 70.779,49.952 70.804,49.952 70.833,49.98 71.111,49.98 v1(71.115,49.984) ; v1@71.904,50 71.915,49.989 v1(71.915,49.984) 71.919,49.98 72.224,49.98 72.285,49.919 72.31,49.919 C97.2@72.32,49.91 ; C97.2@72.32,49.885 C97.2@72.32,49.91 ; v1@72.71,49.984 72.706,49.98 72.415,49.98 72.354,49.919 72.329,49.919 C97.2@72.32,49.91 ; v1(72.715,40.384) v1(73.461,40.384) v1(74.369,40.384) v1(75.115,40.384) 75.12,40.384 75.126,40.378 75.745,40.378 C90.2@75.864,40.258 75.984,40.378 76.201,40.378 76.207,40.384 v1(76.715,40.384) v1(77.515,40.384) ; v1(72.715,49.984) v1(73.515,49.984) v1(74.315,49.984) v1(75.115,49.984) 75.12,49.984 75.306,50.17 C69.2@75.87,50.17 ; v1(76.715,49.984) v1(77.515,49.984) v1(78.315,49.984) v1(79.115,49.984) 79.115,49.989 79.084,50.02 79.084,50.565 C96.2@78.965,50.684 ; C61.2@77.475,39.524 77.475,40.339 77.515,40.379 v1(77.515,40.384) ; C66.2@78.695,40.43 78.292,40.43 v1(78.288,40.434) 78.283,40.434 78.233,40.384 v1(77.515,40.384) ; C66.2@78.861,40.388 79.111,40.388 v1(79.115,40.384) ; v1@79.919,40.388 79.919,39.843 79.94,39.822 79.94,39.797 79.95,39.787 C65.2@79.975,39.787 ; C59.2@80.642,42.271 80.644,42.273 v1@81.123,42.273 ; C58.2@80.675,44.734 80.7,44.734 80.709,44.724 80.709,44.699 80.711,44.697 80.711,44.388 v1(80.715,44.384) ; v1(80.715,47.584) 80.72,47.584 80.751,47.615 81.395,47.615 C54.2@81.515,47.734 ; v1@81.126,42.274 81.455,42.274 C62.2@81.515,42.334
  other v2: 60.3,39.5 63.1,39.5 50.539,39.9 52,39.9 53.4,39.9 60.3,40.6 63.1,40.6 50.539,40.8 52,40.8 53.4,40.8 180.65,76.175 180.65,77.475 148.975,82.825